# Altium PCB CPU.PcbDoc (part 2 of 2)
Units mm, origin at the board's own origin, x right, y up, seen from the top; angles counter-clockwise.
Board outline 46.9 x 22.5 mm, 2 copper layers (Top Layer, Bottom Layer), stack 0.904 mm thick; 53 components, 92 nets, 333 pads, 142 vias.
Unrouted connection lines stored in the file: 2.
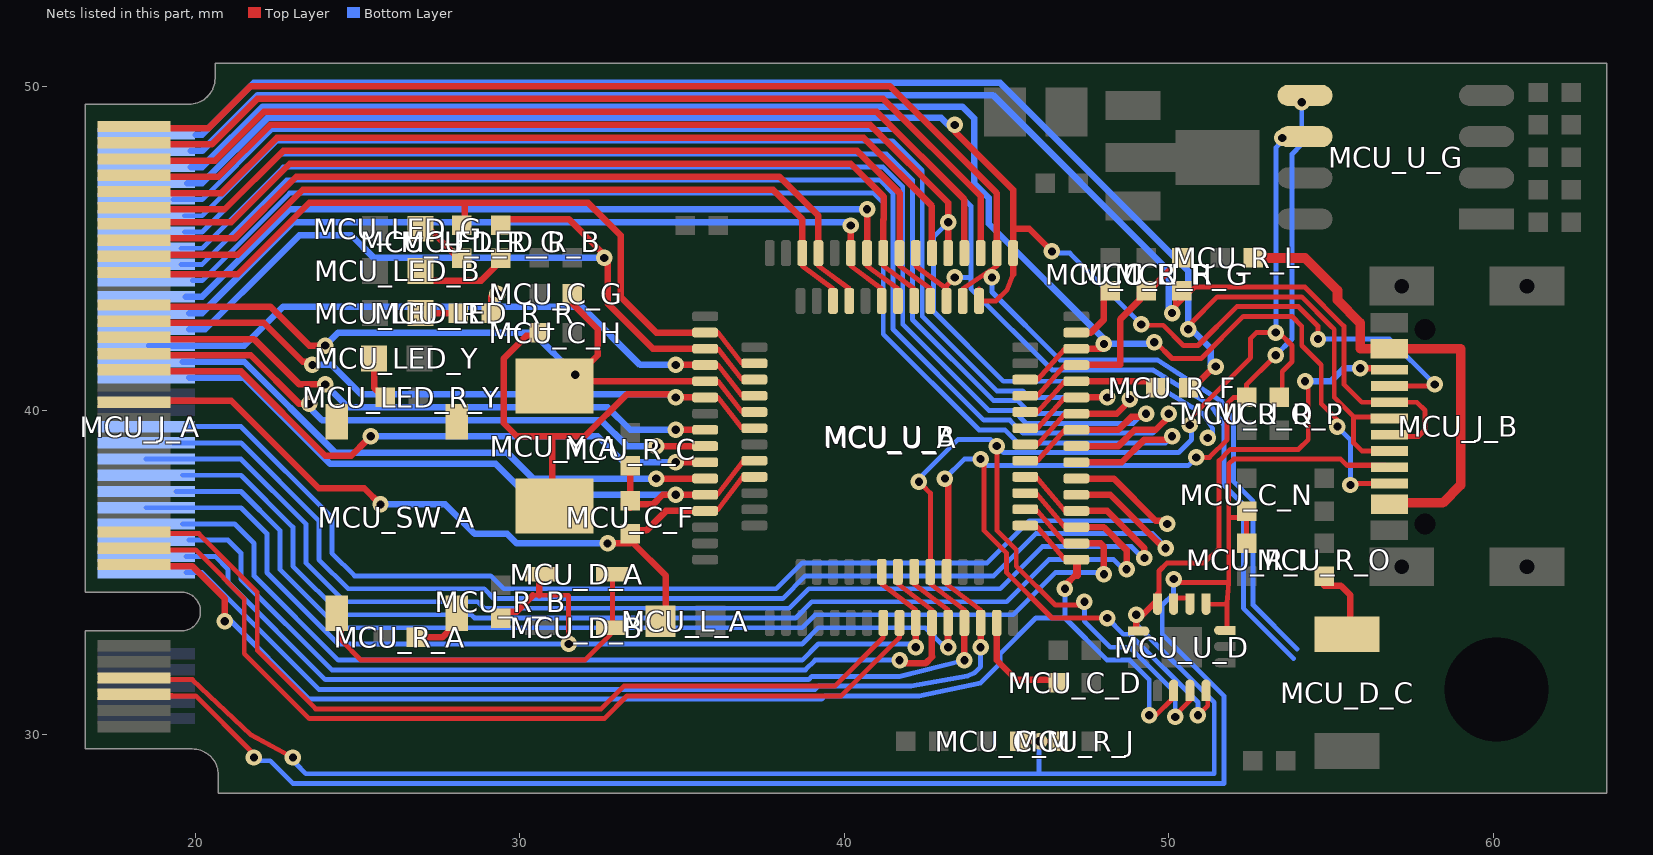
[diagram p2: the nets of this part, all layers, seen from the top]

## Via types
v1: diameter 0.508, hole 0.254, Top Layer to Bottom Layer, tented both sides, 142 vias

## Nets (pads, with @x,y where several pads share a name; then routed paths per layer and width w, separated by ;. In a path a pad name is that pad's centre, name@x,y a point inside that pad or via, vN(x,y) a via of type N, cw(c..) or ccw(c..) an arc to the next point about the centre after c; other vN are vias at no path point) (continued)
MCU_PA8: MCU_J_A.60 MCU_U_A.41 MCU_U_B.29 | length 40.6
  Top Layer w0.15: MCU_U_B.29@45.95,38.45 MCU_U_A.41@46.8,39.4
  Top Layer w0.2: MCU_U_A.41@47.05,39.4 MCU_U_A.41@47.15,39.4 48.45,39.4 48.85,39.8 49.2,39.8 v1(49.3,39.9) v1@49.4,39.9
  Bottom Layer w0.15: MCU_J_A.60@19.55,45 20.2,45 22.7,47.5 41.2,47.5 41.8,46.9 41.8,42.65 44.45,40 45.2,40 45.6,39.6 48.9,39.6 49.25,39.95 v1(49.3,39.9) v1@49.4,39.9
MCU_PA9: MCU_J_A.62 MCU_U_A.42 MCU_U_B.30 | length 39.6
  Top Layer w0.15: MCU_U_B.30@45.95,38.95 MCU_U_A.42@46.8,39.9
  Top Layer w0.2: MCU_U_A.42@46.95,39.9 MCU_U_A.42@47.15,39.9 48.4,39.9 48.8,40.3 v1@48.9,40.3
  Bottom Layer w0.15: MCU_J_A.62@19.65,45.5 20.2,45.5 22.6,47.9 41.3,47.9 42.1,47.1 42.1,42.8 44.6,40.3 45.35,40.3 45.75,39.9 48.4,39.9 48.8,40.3 v1(48.8,40.35)
MCU_PA10: MCU_J_A.64 MCU_U_A.43 MCU_U_B.31 | length 37.8
  Top Layer w0.15: MCU_U_B.31@45.95,39.45 MCU_U_A.43@46.8,40.4
  Top Layer w0.2: MCU_U_A.43@46.9,40.4 MCU_U_A.43@47.15,40.4 v1(48.1,40.4)
  Bottom Layer w0.15: MCU_J_A.64@19.65,46 20.2,46 22.51,48.31 41.49,48.31 42.4,47.4 42.4,42.9 44.7,40.6 45.5,40.6 45.7,40.4 v1(48.1,40.4)
MCU_PA15: MCU_J_A.75 MCU_U_A.50 MCU_U_B.38 | length 48.2
  Top Layer w0.15: MCU_U_B.38@43.65,43.375 43.65,43.75 44.435,44.273 44.469,44.296 MCU_U_A.50@44.7,44.45
  Top Layer w0.2: MCU_J_A.75@19.1,48.7 20.4,48.7 21.7,50 41.4,50 44.7,46.7 MCU_U_A.50@44.7,45
  Bottom Layer w0.15: v1(44.55,44.1) 44.55,43.65 46.65,41.55 49.65,41.55 51.6,40.3 52,39.682 52,37.8 52.6,37.2 52.6,34 53.95,32.65
MCU_PB0: MCU_J_A.26 MCU_U_A.26 MCU_U_B.18 | length 27.8
  Top Layer w0.15: MCU_U_B.18@41.15,35.025 41.15,34.65 MCU_U_A.26@42.2,33.85
  Top Layer w0.2: v1(42.2,32.7) MCU_U_A.26@42.2,33.6
  Bottom Layer w0.15: MCU_J_A.26@19.6,36.5 21.2,36.5 21.8,35.9 21.8,34.9 24.4,32.3 38.7,32.3 39.2,32.8 42.1,32.8 v1(42.2,32.7)
MCU_PB1: MCU_J_A.24 MCU_U_A.27 MCU_U_B.19 | length 27.6
  Top Layer w0.15: MCU_U_B.19@41.65,34.65 MCU_U_A.27@42.7,33.85
  Top Layer w0.2: v1@41.8,32.2 42.5,32.2 42.706,32.41 42.7,32.416 MCU_U_A.27@42.7,33.5
  Bottom Layer w0.15: MCU_J_A.24@19.8,36 21,36 21.4,35.6 21.4,34.8 24.2,32 38.8,32 39.1,32.3 v1(41.7,32.3)
MCU_PB2: MCU_D_A.2 MCU_J_A.28 MCU_R_B.2 MCU_U_A.28 MCU_U_B.20 | length 34.5
  Top Layer w0.15: 30.4,34.3 30.6,34.3 31.5,34.3 v1(31.5,32.8) ; MCU_U_B.20@42.15,34.65 MCU_U_A.28@43.2,33.85
  Top Layer w0.2: MCU_R_B.2@29.4,33.8 29.9,33.8 30.4,34.3 ; 30.6,34.3 MCU_D_A.2@30.6,34.9 ; v1(43.2,32.7) v1@43.2,32.8 ; 43.2,33 v1@43.2,32.8 ; MCU_U_A.28@43.2,33.4 43.194,33.394 43.194,32.806 v1@43.2,32.8
  Bottom Layer w0.15: MCU_J_A.28@18.475,37 21.4,37 22.2,36.2 22.2,35 ; 22.4,34.8 22.2,35 ; v1(43.2,32.7) 43.1,32.7 42.5,33.3 39.2,33.3 38.7,32.8 v1(31.5,32.8) 24.4,32.8 22.2,35
MCU_PB3: MCU_J_A.66 MCU_U_A.55 MCU_U_B.39 | length 49.1
  Top Layer w0.15: MCU_U_A.55@42.2,44.45 MCU_U_B.39@43.15,43.75 ; MCU_U_B.39@43.15,43.375 MCU_U_B.39@43.15,43.75 ; v1(43.4,44.1) 43.15,43.85 MCU_U_B.39@43.15,43.75
  Bottom Layer w0.15: MCU_J_A.66@19.3,46.5 20.2,46.5 22.362,48.662 41.538,48.662 43.9,46.3 43.9,44.05 ; v1(43.4,44.1) 43.85,44.1 43.9,44.05 ; 53.85,32.35 52.3,33.9 52.3,37.1 51.7,37.7 51.7,39.532 51.3,40.15 49.5,41.25 46.4,41.25 43.9,43.75 43.9,44.05
MCU_PB4: MCU_J_A.65 MCU_U_A.56 MCU_U_B.40 | length 27.1
  Top Layer w0.15: MCU_U_A.56@41.7,44.45 MCU_U_B.40@42.65,43.75
  Top Layer w0.2: MCU_J_A.65@19,46.2 20.9,46.2 22.7,48 40.4,48 41.7,46.7 MCU_U_A.56@41.7,44.75
MCU_PB5: MCU_J_A.63 MCU_U_A.57 MCU_U_B.41 | length 26.4
  Top Layer w0.15: MCU_U_A.57@41.2,44.45 MCU_U_B.41@42.15,43.75
  Top Layer w0.2: MCU_J_A.63@19,45.8 21.1,45.8 22.9,47.6 40.2,47.6 41.206,46.594 41.206,45.89 41.2,45.884 MCU_U_A.57@41.2,44.75
MCU_PB6: MCU_J_A.54 MCU_U_A.58 MCU_U_B.42 | length 24.8
  Top Layer w0.15: MCU_U_A.58@40.7,44.45 MCU_U_B.42@41.65,43.75 ; MCU_U_A.58@40.7,44.75 MCU_U_A.58@40.7,44.85
  Top Layer w0.2: MCU_U_A.58@40.7,44.75 v1(40.7,46.2)
  Bottom Layer w0.2: MCU_J_A.54@19.7,43.5 20.2,43.5 22.9,46.2 v1(40.7,46.2)
MCU_PB7: MCU_J_A.52 MCU_U_A.59 MCU_U_B.43 | length 24.3
  Top Layer w0.15: MCU_U_A.59@40.2,44.45 MCU_U_B.43@41.15,43.75 ; MCU_U_B.43@41.1,43.7 MCU_U_B.43@41.15,43.375
  Top Layer w0.2: MCU_U_A.59@40.2,44.65 MCU_U_A.59@40.2,44.85 v1(40.2,45.7)
  Bottom Layer w0.2: MCU_J_A.52@19.8,43 20.2,43 23,45.8 40.1,45.8 v1(40.2,45.7) v1@40.2,45.8
MCU_PB8: MCU_J_A.61 MCU_U_A.61 MCU_U_B.45 | length 24.1
  Top Layer w0.15: MCU_U_A.61@39.2,44.45 40.15,43.75 MCU_U_B.45@40.15,43.375
  Top Layer w0.2: MCU_J_A.61@18.9,45.3 21.2,45.3 23.1,47.2 38,47.2 39.2,46 MCU_U_A.61@39.2,45
MCU_PB9: MCU_J_A.59 MCU_U_A.62 MCU_U_B.46 | length 23.9
  Top Layer w0.15: MCU_U_A.62@38.7,44.45 39.65,43.75 MCU_U_B.46@39.65,43.375
  Top Layer w0.2: MCU_J_A.59@18.9,44.8 21.3,44.8 23.3,46.8 37.8,46.8 38.7,45.9 MCU_U_A.62@38.7,44.85 MCU_U_A.62@38.7,44.55
MCU_PB10: MCU_J_A.22 MCU_R_P.1 MCU_U_A.29 MCU_U_B.21 MCU_U_D.6 MCU_U_G.6 | length 66.5
  Top Layer w0.15: v1@42.4,37.7 42.65,37.45 MCU_U_B.21@42.65,35.3 ; MCU_U_B.21@42.6,35.25 MCU_U_B.21@42.65,35.3 ; MCU_U_B.21@42.65,34.65 MCU_U_A.29@43.7,33.85 ; MCU_U_B.21@42.65,35.025 MCU_U_B.21@42.65,35.3 ; v1@44.7,39 v1(44.7,38.9) 44.7,36.3 44.9,36.1 45.3,35.7 45.3,35.2 46.5,34 47.3,34 v1@47.5,34.2 ; v1@50.2,30.6 50.65,31.05 MCU_U_D.6@50.65,31.185 ; v1(50.65,39.55) 50.75,39.55 50.6,39.7 52.525,41.625 52.525,42.225 52.7,42.4 v1@53.2,42.4 ; MCU_R_P.1@53.4,40.408 53.5,40.508 53.5,41.2 53.8,41.5 53.8,42 v1@53.4,42.4
  Top Layer w0.2: v1(43.7,32.3) MCU_U_A.29@43.7,33.45 MCU_U_A.29@43.75,33.5
  Bottom Layer w0.15: MCU_J_A.22@19.7,35.5 20.6,35.5 21,35.1 21,34.7 24,31.7 38.9,31.7 39,31.8 41.7,31.8 v1(43.7,32.3) ; v1@42.4,37.9 42.4,38 43.5,39.1 44.5,39.1 v1(44.7,38.9) ; v1@44.7,39 v1(44.7,38.9) ; v1(47.4,34.1) 47.4,33.5 48.2,32.7 48.8,32.7 50.2,31.3 v1@50.2,30.6 ; v1(50.65,39.55) 50.7,39.5 50.7,39.1 50.3,38.7 44.9,38.7 v1(44.7,38.9) ; v1(53.3,42.4) 53.3,47.7 53.3,47.9 53.3,48.1 53.55,48.35 v1(53.5,48.4)
  other v1: 50.2,30.55 42.3,37.8
MCU_PB11: MCU_J_A.20 MCU_R_Q.1 MCU_U_A.30 MCU_U_B.22 MCU_U_D.7 MCU_U_G.5 | length 65
  Top Layer w0.15: MCU_U_B.22@43.15,34.65 MCU_U_A.30@44.2,33.85 ; v1@44.3,38.6 44.3,36.3 45,35.6 45,35 46.4,33.6 v1(48.1,33.6) ; v1(50.85,38.55) 51.25,38.55 51.8,39.1 51.8,40.2 52,40.4 MCU_R_Q.1@52.3,40.4 ; v1(50.9,30.6) 51.2,30.9 MCU_U_D.7@51.2,31.3 ; MCU_R_Q.1@52.4,40.408 52.4,40.8 v1@53.2,41.6
  Top Layer w0.2: MCU_U_B.22@43.15,35.025 43.2,35.075 v1@43.2,38 ; v1(44.2,32.7) MCU_U_A.30@44.2,33.2
  Bottom Layer w0.15: MCU_J_A.20@19.7,35 20.2,35 23.8,31.4 39.1,31.4 39.2,31.5 42.054,31.5 43.794,31.814 44,31.9 44.2,32.1 v1(44.2,32.7) ; v1(43.1,37.9) 43.7,38.5 v1(44.2,38.5) 44.4,38.3 50.6,38.3 50.8,38.5 50.85,38.45 v1(50.85,38.55) ; v1(48.1,33.6) 48.6,33.1 48.8,33.1 50.9,31 v1(50.9,30.6) ; v1(53.3,41.7) 53.8,42.2 53.8,47.1 53.8,47.7 53.8,47.9 54.1,48.2 v1(54.1,49.5)
MCU_PB12: MCU_J_A.21 MCU_U_A.33 MCU_U_B.25 MCU_U_D.5 | length 40.3
  Top Layer w0.15: MCU_U_B.25@45.95,36.4 MCU_U_A.33@46.8,35.4 ; v1@49.6,30.6 50.1,31.1 50.1,31.135 MCU_U_D.5@50.15,31.185
  Top Layer w0.2: MCU_J_A.21@18.8,35.2 19.9,35.2 20.9,34.2 v1(20.9,33.5) ; v1(46.8,34.5) 46.8,34.6 47.15,34.95 ; 47.15,34.9 47.15,34.95 ; MCU_U_A.33@47.15,35.4 47.15,34.95 ; 47.2,34.9 47.2,35 ; MCU_U_A.33@47.2,35.4 47.2,35 ; 47.15,34.95 47.2,35
  Bottom Layer w0.15: v1@21,33.6 23.5,31.1 39.3,31.1 39.4,31.2 42.3,31.2 44.2,31.6 44.8,32.2 44.8,32.5 45.9,33.6 46.8,33.6 ; v1(46.8,34.5) 46.8,33.6 ; v1(49.4,30.6) 49.4,31.7 48.8,32.3 48.1,32.3 46.8,33.6
MCU_PB13: MCU_J_A.30 MCU_U_A.34 MCU_U_B.26 | length 35.4
  Top Layer w0.15: MCU_U_B.26@45.95,36.9 MCU_U_A.34@46.8,35.9
  Top Layer w0.2: MCU_U_A.34@46.85,35.9 MCU_U_A.34@47.15,35.9 47.9,35.9 48,35.8 v1(48,34.95)
  Bottom Layer w0.15: MCU_J_A.30@19.4,37.5 21.4,37.5 22.6,36.3 22.6,35.1 24.4,33.3 38.7,33.3 39.1,33.7 45.2,33.7 46.5,35 48.15,35 48.1,34.95 v1(48,34.95)
MCU_PB14: MCU_J_A.32 MCU_U_A.35 MCU_U_B.27 | length 36.8
  Top Layer w0.15: MCU_U_B.27@45.904,37.454 MCU_U_A.35@46.8,36.4
  Top Layer w0.2: MCU_U_A.35@47.05,36.4 MCU_U_A.35@47.15,36.4 48,36.4 48.7,35.7 v1(48.7,35.1)
  Bottom Layer w0.15: MCU_J_A.32@19.6,38 21.4,38 23,36.4 23,35.2 24.5,33.7 28.5,33.7 28.6,33.6 38.5,33.6 39,34.1 45,34.1 46.3,35.4 48.3,35.4 v1@48.725,34.975 ; v1(48.7,35.1) 48.7,35 v1@48.75,34.95 ; v1@48.725,34.975 v1@48.75,34.95 ; v1@48.725,34.975 48.75,35 v1@48.75,34.95
MCU_PB15: MCU_J_A.34 MCU_U_A.36 MCU_U_B.28 | length 38.9
  Top Layer w0.15: MCU_U_B.28@45.904,37.954 MCU_U_A.36@46.8,36.9
  Top Layer w0.2: MCU_U_A.36@46.95,36.9 MCU_U_A.36@47.15,36.9 48.1,36.9 49.25,35.75 v1(49.25,35.45) v1@49.25,35.35
  Bottom Layer w0.15: MCU_J_A.34@18.475,38.5 21.4,38.5 23.4,36.5 23.4,35.3 24.6,34.1 28.7,34.1 28.9,33.9 38.3,33.9 38.9,34.5 44.8,34.5 46.1,35.8 48.85,35.8 49.2,35.45 v1(49.25,35.45)
MCU_PC0: MCU_J_A.49 MCU_U_A.8 | length 18.4
  Top Layer w0.2: MCU_J_A.49@18.9,42.2 21.8,42.2 23.2,40.8 v1(24,40.8) v1@24.1,40.9 ; v1@34.7,39.4 v1(34.8,39.4) MCU_U_A.8@35.708,39.4 MCU_U_A.8@35.95,39.4
  Bottom Layer w0.2: v1(24,40.8) 24.7,40.1 32.7,40.1 33.4,39.4 v1@34.7,39.4
MCU_PC1: MCU_J_A.47 MCU_U_A.9 | length 17.8
  Top Layer w0.2: MCU_J_A.47@19.1,41.7 21.7,41.7 23.2,40.2 v1(23.5,40.2) v1@23.5,40.1 ; v1(34.2,38.9) MCU_U_A.9@35.708,38.9 MCU_U_A.9@35.85,38.9
  Bottom Layer w0.2: v1@23.6,40.2 23.6,40 23.9,39.7 32.5,39.7 33.3,38.9 v1@34,38.9
MCU_PC2: MCU_J_A.45 MCU_U_A.10 | length 18.3
  Top Layer w0.2: MCU_J_A.45@19.2,41.2 21.4,41.2 24,38.6 24.8,38.6 v1@25.3,39.1 ; v1@34.7,38.4 v1(34.8,38.4) MCU_U_A.10@35.708,38.4 MCU_U_A.10@35.95,38.4
  Bottom Layer w0.2: v1(25.4,39.2) 32.4,39.2 33.2,38.4 v1@34.7,38.4
MCU_PC3: MCU_J_A.46 MCU_U_A.11 | length 17.8
  Top Layer w0.2: v1@34.1,37.9 v1(34.2,37.9) MCU_U_A.11@35.708,37.9 MCU_U_A.11@35.95,37.9
  Bottom Layer w0.2: MCU_J_A.46@19.6,41.5 21.5,41.5 24.3,38.7 29.6,38.7 30.4,37.9 v1@34.1,37.9
MCU_PC4: MCU_J_A.25 MCU_U_A.24 | length 27.1
  Top Layer w0.15: MCU_J_A.25@18.9,36.2 20.1,36.2 21.9,34.4 21.9,32.6 21.902,32.6 23.702,30.8 32.5,30.8 33.2,31.5 39.7,31.5 41.2,33 MCU_U_A.24@41.2,33.45 MCU_U_A.24@41.2,33.55
MCU_PC5: MCU_J_A.23 MCU_U_A.25 | length 27.6
  Top Layer w0.15: MCU_J_A.23@18.8,35.7 20,35.7 20.2,35.5 21.5,34.2 21.5,32.5 21.503,32.5 23.503,30.5 32.6,30.5 33.3,31.2 39.9,31.2 41.694,32.994 41.694,33.544 MCU_U_A.25@41.7,33.55
MCU_PC6: MCU_J_A.36 MCU_U_A.37 | length 37.7
  Top Layer w0.2: MCU_U_A.37@47.25,37.4 47.9,37.4 48.1,37.4 48.2,37.4 49.4,36.2 v1@49.875,35.725
  Bottom Layer w0.15: MCU_J_A.36@19.3,39 21.4,39 23.8,36.6 23.8,35.4 24.7,34.5 28.9,34.5 29.2,34.2 38.1,34.2 38.8,34.9 44.6,34.9 45.9,36.2 49.5,36.2 49.95,35.75 v1(49.9,35.75)
MCU_PC7: MCU_J_A.38 MCU_U_A.38 | length 37.8
  Top Layer w0.2: MCU_U_A.38@46.85,37.9 MCU_U_A.38@47.15,37.9 48.3,37.9 49.6,36.6 49.9,36.6 49.95,36.65 v1(49.95,36.5)
  Bottom Layer w0.15: MCU_J_A.38@19.7,39.5 21.4,39.5 24.2,36.7 24.2,35.6 24.9,34.9 29.1,34.9 29.5,34.5 37.9,34.5 38.7,35.3 44.4,35.3 45.7,36.6 49.9,36.6 49.95,36.65 v1(49.95,36.5)
MCU_PC8: MCU_J_A.56 MCU_U_A.39 | length 40.3
  Top Layer w0.2: MCU_U_A.39@47.05,38.4 MCU_U_A.39@47.15,38.4 48.55,38.4 49.25,39.1 50,39.1 v1(50.1,39.2)
  Bottom Layer w0.15: MCU_J_A.56@19.9,44 20.2,44 22.9,46.7 40.9,46.7 41.2,46.4 41.2,42.35 44.15,39.4 44.95,39.4 45.35,39 49.9,39 v1(50.1,39.2)
MCU_PC9: MCU_J_A.58 MCU_U_A.40 | length 41
  Top Layer w0.2: MCU_U_A.40@47.05,38.9 MCU_U_A.40@47.15,38.9 48.45,38.9 48.95,39.4 49.6,39.4 50.05,39.85 v1(50,39.9)
  Bottom Layer w0.15: MCU_J_A.58@19.55,44.5 20.2,44.5 22.8,47.1 41.1,47.1 41.5,46.7 41.5,42.5 44.3,39.7 45.1,39.7 45.5,39.3 49.5,39.3 50.05,39.85 v1(50,39.9)
MCU_PC10: MCU_J_A.73 MCU_U_A.51 | length 28.8
  Top Layer w0.2: MCU_J_A.73@19.1,48.2 20.5,48.2 21.9,49.6 41.2,49.6 44.2,46.6 44.2,45.7 MCU_U_A.51@44.2,44.85 MCU_U_A.51@44.2,44.75
MCU_PC11: MCU_J_A.71 MCU_U_A.52 | length 28.1
  Top Layer w0.2: MCU_J_A.71@19.1,47.7 20.6,47.7 22.1,49.2 41,49.2 43.7,46.5 MCU_U_A.52@43.7,44.85 MCU_U_A.52@43.7,44.75
MCU_PC12: MCU_J_A.69 MCU_U_A.53 | length 40.6
  Top Layer w0.2: MCU_J_A.69@19.1,47.2 20.7,47.2 22.3,48.8 40.8,48.8 43.2,46.4 43.2,45.95 MCU_U_A.53@43.2,44.85 MCU_U_A.53@43.2,44.75
  Bottom Layer w0.15: v1(43.2,45.8) 42.75,45.35 42.75,43.05 44.9,40.9 49.4,40.9 51.05,39.9 51.35,39.45 v1@51.35,39.2
  other v1: 51.2,39.15
MCU_PC13: MCU_J_A.57 MCU_LED_R_G.1 MCU_U_A.2 MCU_U_B.2 | length 23.7
  Top Layer w0.15: MCU_U_A.2@36.1,42.4 MCU_U_B.2@36.85,41.45
  Top Layer w0.2: MCU_J_A.57@18.7,44.2 21.3,44.2 23.5,46.4 28.3,46.4 ; MCU_LED_R_G.1@28.4,45.5 28.3,45.6 28.3,46.4 ; 35.1,42.4 MCU_U_A.2@35.708,42.4 35.85,42.4 34.2,42.4 33.1,43.5 33.1,45.4 32.1,46.4 28.3,46.4
MCU_PC14: MCU_J_A.50 MCU_LED_R_B.1 MCU_U_A.3 MCU_U_B.3 | length 24.7
  Top Layer w0.15: MCU_U_A.3@35.708,41.9 36.1,41.9 MCU_U_B.3@36.85,40.95
  Top Layer w0.2: MCU_LED_R_B.1@29.4,45.708 29.592,45.9 31.5,45.9 v1@32.6,44.8 ; v1(32.6,44.7) 32.7,44.6 32.7,43.3 34.1,41.9 MCU_U_A.3@35.708,41.9
  Bottom Layer w0.2: MCU_J_A.50@19.8,42.5 20.3,42.5 22.5,44.7 23.2,45.4 24.8,45.4 25.5,44.7 v1(32.6,44.7)
MCU_PC15: MCU_J_A.48 MCU_LED_R_R.1 MCU_U_A.4 MCU_U_B.4 | length 20.9
  Top Layer w0.15: MCU_U_A.4@36.1,41.4 MCU_U_B.4@36.85,40.45
  Top Layer w0.2: MCU_LED_R_R.1@29.108,43 29.108,43.508 v1@29.2,43.6 ; v1@34.7,41.4 v1(34.8,41.4) MCU_U_A.4@35.708,41.4 MCU_U_A.4@35.95,41.4
  Bottom Layer w0.2: MCU_J_A.48@18.575,42 21.5,42 22.7,43.2 29.3,43.2 ; v1(29.3,43.6) 29.3,43.2 ; v1@34.7,41.4 33.7,41.4 31.9,43.2 29.3,43.2
MCU_PD2: MCU_J_A.67 MCU_U_A.54 | length 26.8
  Top Layer w0.2: MCU_J_A.67@19,46.7 20.8,46.7 22.5,48.4 40.6,48.4 42.7,46.3 MCU_U_A.54@42.7,44.85 MCU_U_A.54@42.7,44.75
MCU_USB_CC1: MCU_C_N.1 MCU_J_A.5 MCU_J_B.A5 MCU_R_I.1 MCU_U_D.10 MCU_U_D.11 | length 58.3
  Top Layer w0.15: MCU_J_A.5@18.1,31.25 19.9,31.2 ; MCU_J_A.5@19,31.2 19.9,31.2 ; v1(21.8,29.3) 21.7,29.5 20,31.2 19.9,31.2 ; v1@50.3,34.7 51.85,34.7 ; MCU_U_D.11@51.15,34.025 51.775,34.025 ; MCU_U_D.10@51.8,33.3 51.8,34 51.775,34.025 ; MCU_R_I.1@52.4,35.708 52.4,35.808 MCU_C_N.1@52.4,36.692 ; MCU_C_N.1@52.4,36.7 51.85,36.7 ; MCU_J_B.A5@57.1,38.3 MCU_J_B.A5@56.7,38.3 ; 51.775,34.025 51.8,34.05 51.85,34.7 ; 51.85,34.7 51.85,36.7 ; 51.85,36.7 51.85,38.35 52,38.5 55.3,38.5 55.475,38.325 ; 55.475,38.325 55.5,38.3 MCU_J_B.A5@56.7,38.3 ; 55.475,38.325 56.675,38.325 MCU_J_B.A5@56.7,38.3
  Bottom Layer w0.15: v1@21.8,29.2 22.3,29.2 23,28.5 51.7,28.5 51.7,31.2 49.8,33.1 49.8,34 50.15,34.35 v1(50.15,34.8)
MCU_USB_CC2: MCU_C_M.1 MCU_J_A.7 MCU_J_B.B5 MCU_R_J.1 MCU_U_D.1 MCU_U_D.14 | length 56.2
  Top Layer w0.15: MCU_J_A.7@18.9,31.7 19.9,31.7 21.7,30 v1(23,29.3) ; MCU_C_M.1@45.6,29.8 v1(46,29.8) MCU_R_J.1@46.592,29.8 ; MCU_U_D.14@49.65,34.215 49.65,34.35 49.7,34.4 49.7,35.05 49.95,35.3 51.1,35.3 51.55,35.75 51.55,38.45 51.9,38.8 54,38.8 54.3,39.1 v1@54.3,40.9
  Top Layer w0.2: MCU_U_D.1@48.885,33.196 49,33.311 v1(49,33.7) 49.2,33.7 MCU_U_D.14@49.6,34.1 ; v1(55.9,41.3) MCU_J_B.B5@57.2,41.3
  Bottom Layer w0.15: v1@23.1,29.1 23.4,28.8 46,28.8 ; v1@46,29.7 46,28.8 ; v1(49,33.7) 49,33.4 51.4,31 51.4,28.8 46,28.8
  Bottom Layer w0.2: v1(54.2,40.9) 55,40.9 55.4,41.3 v1(55.9,41.3)
MCU_VDDA: MCU_C_F.2 MCU_J_A.41 MCU_L_A.1 MCU_U_A.13 MCU_U_B.9 | length 23.2
  Top Layer w0.15: MCU_U_A.13@36.1,36.95 MCU_U_B.9@36.9,38
  Top Layer w0.2: MCU_J_A.41@19,40.3 21.1,40.3 23.8,37.6 25.2,37.6 v1(25.7,37.1) ; v1(32.7,35.9) MCU_C_F.2@33.4,35.9 ; MCU_C_F.2@33.4,36 33.4,35.992 33.492,35.9 33.492,35.908 34.5,34.9 34.5,33.8 MCU_L_A.1@34.2,33.8 ; MCU_C_F.2@33.5,36.2 33.6,36.3 33.9,36.3 34.5,36.9 MCU_U_A.13@35.708,36.9 MCU_U_A.13@35.85,36.9
  Bottom Layer w0.2: v1(25.7,37.1) 27.7,37.1 28.6,36.2 29.6,36.2 29.9,35.9 v1(32.7,35.9)
MCU_VSSA: MCU_C_F.1 MCU_J_A.44 MCU_R_C.2 MCU_U_A.12 MCU_U_B.8 | length 21.9
  Top Layer w0.15: MCU_U_A.12@36.094,37.405 36.89,38.45 MCU_U_B.8@37.225,38.45
  Top Layer w0.2: MCU_C_F.1@33.2,37.1 MCU_C_F.1@33.4,37.1 ; MCU_C_F.1@33.4,37 MCU_C_F.1@33.4,37.1 ; MCU_R_C.2@33.4,38.092 MCU_C_F.1@33.4,37.208 MCU_C_F.1@33.4,37.1 ; v1@34.6,37.4 v1(34.8,37.4) ; MCU_U_A.12@35.85,37.4 MCU_U_A.12@35.708,37.4 v1(34.8,37.4) ; MCU_C_F.1@33.4,37.1 34.1,37.1 34.4,37.4 v1(34.8,37.4)
  Bottom Layer w0.2: MCU_J_A.44@19.8,41 21.5,41 24.15,38.35 29.25,38.35 30.2,37.4 34.5,37.4
MCU_XIN: MCU_C_G.2 MCU_J_A.53 MCU_U_A.5 MCU_U_B.5 MCU_Y_A.1 | length 22.6
  Top Layer w0.15: MCU_U_A.5@36.1,40.9 MCU_U_B.5@36.85,39.95
  Top Layer w0.2: MCU_J_A.53@19.1,43.2 22.3,43.2 23.5,42 v1(24,42) ; MCU_Y_A.1@31.1,41.3 MCU_Y_A.1@31.3,41.5 ; MCU_Y_A.1@31.5,41.4 MCU_Y_A.1@31.508,41.408 ; MCU_Y_A.1@31.6,40.8 32.1,41.3 32.1,40.9 MCU_U_A.5@35.708,40.9 MCU_U_A.5@35.8,40.9 ; MCU_C_G.2@31.608,43.3 31.608,43.292 32.4,42.5 32.4,41.7 MCU_Y_A.1@32,41.3
  Bottom Layer w0.2: v1(24,42) 24.4,42.4 30.4,42.4 v1(31.7,41.1)
MCU_XOUT: MCU_C_H.2 MCU_J_A.51 MCU_U_A.6 MCU_U_B.6 MCU_Y_A.2 | length 29.7
  Top Layer w0.15: MCU_U_A.6@36.1,40.4 MCU_U_B.6@36.85,39.45
  Top Layer w0.2: MCU_J_A.51@19,42.7 22.1,42.7 23.3,41.5 v1@23.6,41.5 ; MCU_C_H.2@30.592,42.3 30.2,42.3 29.5,41.6 29.5,39.6 29.9,39.2 32,39.2 33.3,40.5 34.7,40.5 v1(34.8,40.4) MCU_U_A.6@35.708,40.4 MCU_U_A.6@35.85,40.4 ; MCU_Y_A.2@31,37.8 31,39.1 ; MCU_Y_A.2@31.7,37.1 MCU_Y_A.2@31.708,37.1
  Bottom Layer w0.2: v1(23.6,41.4) 24.2,41.4 25.1,40.5 v1@34.8,40.5
NetCHA_D_A_1: 
NetCHA_OPTO_1: 
NetCHA_Q_A_3: 
NetMCU_C_D_1: MCU_C_D.1 MCU_U_A.31 | length 3.4
  Top Layer w0.2: MCU_U_A.31@44.7,33.45 44.7,32.9 44.7,32.3 45.3,31.7 MCU_C_D.1@46.7,31.7
NetMCU_C_E_1: MCU_C_E.1 MCU_U_A.47 | length 2.2
  Top Layer w0.2: MCU_U_A.47@47.15,42.4 47.6,42.4 48,42.8 48,43.8 MCU_C_E.1@48.2,43.8
NetMCU_D_A_1: MCU_D_A.1 MCU_D_B.1 MCU_SW_A.2 | length 11.9
  Top Layer w0.15: MCU_SW_A.2@24.5,33.9 24.5,32.9 25.1,32.3 32,32.3 32.8,33.1 MCU_D_B.1@32.8,33.2 ; MCU_D_A.1@32.8,35.1 32.85,35.05 MCU_D_A.1@32.85,34.95 MCU_D_B.1@32.85,33.25
NetMCU_D_C_1: MCU_D_C.1 MCU_R_O.1 | length 1.9
  Top Layer w0.2: 54.8,34.592 55.308,34.592 55.6,34.3 MCU_D_C.1@55.6,33.3
NetMCU_LED_B_1: MCU_LED_B.1 MCU_LED_R_B.2 | length 3.1
  Top Layer w0.2: MCU_LED_B.1@26.93,44.3 27.23,44 28.8,44 MCU_LED_R_B.2@29.6,44.8
NetMCU_LED_G_1: MCU_LED_G.1 MCU_LED_R_G.2 | length 1.7
  Top Layer w0.2: MCU_LED_G.1@26.93,45.6 27.2,45.6 28,44.8 MCU_LED_R_G.2@28,44.5
NetMCU_LED_R_1: MCU_LED_R.1 MCU_LED_R_R.2 | length 1.3
  Top Layer w0.2: MCU_LED_R.1@26.8,43 MCU_LED_R_R.2@28.092,43
NetMCU_LED_R_Y_2: MCU_LED_R_Y.2 MCU_LED_Y.2 | length 1.3
  Top Layer w0.2: MCU_LED_Y.2@25.5,41.6 25.5,40.7 MCU_LED_R_Y.2@25.8,40.4
NetMCU_R_A_1: MCU_R_A.1 MCU_SW_A.1 | length 1.4
  Top Layer w0.2: MCU_R_A.1@26.808,33 27.6,33 MCU_SW_A.1@28,33.4 ; MCU_SW_A.1@28,39.3 MCU_SW_A.1@28.05,39.25
NetMCU_U_D_12: MCU_U_D.12 MCU_U_D.13 | length 0.6
  Top Layer w0.15: MCU_U_D.13@50.15,34.215 50.585,34.215 MCU_U_D.12@50.7,34.1
SWCLK: MCU_J_A.68 MCU_J_B.A8 MCU_U_A.49 MCU_U_B.37 | length 49.5
  Top Layer w0.15: MCU_U_B.37@44.15,43.75 MCU_U_B.37@44.15,43.375 ; MCU_U_B.37@44.2,43.7 MCU_U_B.37@44.15,43.375 ; 45.2,44.2 45,43.7 44.675,43.375 MCU_U_B.37@44.15,43.375 ; v1@49.35,42.6 49.375,42.625 49.825,42.625 50.45,42 50.9,42 52.1,43.2 54,43.2 54.6,42.6 v1(54.6,42.2) v1@54.7,42.2 ; MCU_J_B.A8@56.803,40.75 58.05,40.75 v1@58.1,40.7
  Top Layer w0.2: v1(43.4,48.8) 43.4,48.6 45.2,46.8 45.2,45.6 ; 45.2,44.2 MCU_U_A.49@45.2,44.85 45.2,45.6 ; v1@46.3,45 45.7,45.6 45.2,45.6
  Bottom Layer w0.15: v1@46.4,44.85 46.95,44.85 v1(49.15,42.65) ; v1(54.6,42.2) 56.8,42.2 v1(58.2,40.8) v1@58.25,40.75
  Bottom Layer w0.2: MCU_J_A.68@19.75,47 20.2,47 22.214,49.014 42.986,49.014 43.2,48.8 v1(43.4,48.8)
  other v1: 46.4,44.9
SWDIO: MCU_J_A.70 MCU_J_B.B8 MCU_U_A.46 MCU_U_B.34 | length 50.4
  Top Layer w0.15: MCU_U_B.34@45.65,41 45.95,40.95 46.8,41.9 MCU_U_A.46@47.15,41.9 ; v1@49.6,42.1 50.1,41.6 51,41.6 52.3,42.9 53.8,42.9 54.1,42.6 54.1,42 54.7,41.4 54.7,40.2 v1@55.3,39.6 ; v1(55.6,37.7) 55.65,37.75 MCU_J_B.B8@56.803,37.75
  Top Layer w0.2: MCU_U_A.46@47.15,41.9 v1@48,41.9
  Bottom Layer w0.15: v1(55.2,39.5) 55.6,39.1 v1(55.6,37.7)
  Bottom Layer w0.2: MCU_J_A.70@19.85,47.5 20.2,47.5 22.067,49.367 43.633,49.367 44,49 44,47 44.45,46.55 44.45,45.75 48,42.2 v1(48,42.05) 48,41.9 48.15,42.05 v1@49.65,42.05
  other v1: 49.55,42.1
USB_5_V: MCU_J_B.A4_B9 MCU_J_B.A9_B4 MCU_R_L.2 | length 14.3
  Top Layer w0.3: MCU_R_L.2@52.608,44.7 54.2,44.7 55.2,43.7 55.2,43.4 55.9,42.7 55.9,41.9 56.6,41.9 MCU_J_B.A9_B4@56.7,41.8 ; MCU_J_B.A4_B9@56.803,37.15 58.45,37.15 59,37.7 59,41.9 MCU_J_B.A9_B4@57.3,41.9
USB_DM: MCU_J_A.74 MCU_J_B.A7 MCU_J_B.B7 MCU_R_F.1 | length 50.3
  Top Layer w0.15: v1@50.7,42.4 50.7,42.7 51.5,43.5 54.1,43.5 55,42.6 55.1,42.5 55.1,40.4 55.7,39.8 ; MCU_J_B.B7@56.803,38.75 55.95,38.75 55.7,39 55.7,39.8 ; MCU_J_B.A7@57.1,39.8 55.7,39.8
  Top Layer w0.2: MCU_R_F.1@50.6,40.592 MCU_R_F.1@50.7,40.692 ; v1(51.45,41.35) 51.4,41.35 v1@51.379,41.329 ; MCU_R_F.1@50.7,40.692 50.592,40.692 50.6,40.7 MCU_R_F.1@50.608,40.7 MCU_R_F.1@50.708,40.7 ; MCU_R_F.1@50.7,40.692 MCU_R_F.1@50.708,40.7 ; MCU_R_F.1@50.708,40.7 50.729,40.679 51.325,41.275 v1@51.35,41.3 ; v1@51.35,41.3 51.35,41.358 v1@51.379,41.329 ; v1@51.35,41.3 v1@51.379,41.329
  Bottom Layer w0.2: 20,48.5 20.2,48.5 21.8,50.1 44.8,50.1 50.6,44.3 v1(50.6,42.5) 50.7,42.5 51.3,41.9 v1@51.3,41.4 ; v1@51.4,41.25 51.45,41.3 v1(51.45,41.35)
USB_DM_R: MCU_R_F.2 MCU_U_A.44 MCU_U_B.32 | length 3.8
  Top Layer w0.15: MCU_U_B.32@45.95,39.95 MCU_U_A.44@46.8,40.9
  Top Layer w0.2: MCU_U_A.44@47.15,40.9 MCU_R_F.2@49.7,40.9
USB_DP: MCU_J_A.72 MCU_J_B.A6 MCU_J_B.B6 MCU_R_G.1 | length 47.4
  Top Layer w0.15: v1@50,42.9 v1(50.1,43) ; v1@50.2,42.9 v1(50.1,43) ; v1@50.2,43.1 v1@50.2,43.2 ; MCU_R_G.1@50.2,43.6 v1@50.2,43.2 ; MCU_J_B.A6@57.3,39.2 57.7,39.2 57.9,39.4 57.9,40 57.65,40.25 MCU_J_B.B6@56.803,40.25 55.95,40.25 55.4,40.8 55.4,42.6 54.2,43.8 50.8,43.8 v1@50.2,43.2 ; v1(50.1,43) 50.1,43.1 v1@50.2,43.2
  Bottom Layer w0.2: MCU_J_A.72@19.85,48 20.2,48 21.919,49.719 44.581,49.719 50,44.3 v1@50,42.9
USB_DP_R: MCU_R_G.2 MCU_R_H.1 MCU_U_A.45 MCU_U_B.33 | length 6.8
  Top Layer w0.15: MCU_U_B.33@45.95,40.45 MCU_U_A.45@46.8,41.4
  Top Layer w0.2: MCU_U_A.45@47.15,41.4 48.5,41.4 48.5,42.8 49.1,43.4 49.1,43.6 MCU_R_H.1@49.2,43.7 ; MCU_R_H.1@49.2,43.692 49.29,43.722 49.499,43.792 MCU_R_G.2@50.4,44.7
pads on no net: MCU_J_A.1 MCU_J_A.3 MCU_J_B.M
copper on no net: | length 0.1
  Top Layer w0.15: 18.1,30.75 18.15,30.7

## Polygon pours and split planes (outlines as drawn)
MCU_GND on Top Layer "Top Layer-MCU_GND" (solid, remove dead copper, pour order 40): 42.3,28.5 63.2,28.5 63.2,50.4 42.3,50.4
CPU_5_V_SW on Top Layer "Top Layer-CPU_5_V_SW" (solid, pour order 36): 21.5,30.5 42.4,31.4 42.4,29.3 22.5,29.3 21.5,30.3
no net on Top Layer "Top Layer-No Net 2" (solid, pour order 38): 42.3,28.9
no net on Top Layer "Top Layer-No Net" (solid, pour order 22): 24,29.4
no net on Top Layer "Top Layer-No Net 1" (solid, pour order 32): 61.1,36.7
MCU_GND on Bottom Layer "Bottom Layer-GND" (solid, remove dead copper, pour order 24): 63.2,28.5 63.2,50.4 22.5,50.4 22.5,28.5
no net on Bottom Layer "Bottom Layer-No Net" (solid, pour order 48): 64.5,49.6

## Other copper
Top Layer:
  rectangle net MCU_GND: 47.1,49.2 48.7,49.6
  rectangle net MCU_3V3: 47.2,46 50.8,46.4
  rectangle net MCU_5V: 51.3,45.7 52.8,47.9
  rectangle net MCU_3V3: 36.6,44.2 37.2,45
  rectangle net MCU_3V3: 47.1,43.3 47.5,47
  rectangle net CPU_5_V_SW: 17.2,32.2 19.1,32.8
  region net CPU_5_V_SW: 21.196,30.803 19.9,32.1 19.6,32.1 19.6,32.8 20.7,32.8 23.8,29.7 23.124,29.7 22.397,30.001 cw(c23.814,33.421)
  region: 25.4,41.5
  region: 25.6,41.4
  region net MCU_3V3: 36,44.4 37.2,44.4 38.3,43.3 38.3,42.7 38.7,42.7 38.7,41.9 38.2,41.9 38,41.9 38,42.4 37.1,42.4 36,43.5
  region net MCU_3V3: 40.7,42 41.4,42.7 44.4,42.7 45.202,43.502 47.2,43.502 47.2,43.2 46.2,43.2 45.3,42.3 45,42.3 45,42
  region net MCU_GND: 39,36.6 39,38.8 40.4,38.8 43.2,41.6 44.7,41.6 44.7,39.3 42.1,39.3 39.4,36.6
  region net MCU_3V3: 38.6,39 40.3,39 43.2,41.9 38.6,41.9
  region net MCU_3V3: 38,36.2 38,42 38.7,42 38.7,36.8
  region: 17.3,30.2
  region: 28,36.9
  region: 31.7,36.7
  region: 43.3,35
  region: 49.6,34.9
  region: 49.8,35.1
Bottom Layer:
  rectangle net MCU_GND: 38.2,42.1 39.7,45.2
  rectangle net MCU_GND: 17.3,30.4 19.6,32.5
  rectangle net MCU_GND: 21,29.9 37.8,30.8
  region net MCU_PB10: 42.4,37.7
  region net MCU_GND: 41.216,38.6 42.6,38.6 42.6,40.1 37.5,45.2 36,45.2 36,41.3 36,36.4 38.928,36.4
  region net MCU_GND: 21.9,30
  region net MCU_GND: 20.7,29.9 20.3,30.3 20.1,30.3 20.1,32.7 21.3,32.7 24.1,29.9

## Silkscreen, mask and mechanical layers (free items; w line width, h text height)
Top Overlay:
  pour cut-out: 37.3,32.7 45.6,32.7 45.6,32.9 cw(c47.7,32.9) 47.7,35 47.9,35 47.9,43.25 47.85,43.25 cw(c47.85,45.5) 45.6,45.5 45.6,45.6 37.3,45.6 37.3,45.5 cw(c35.1,45.5) 35.1,43.3 35,43.3 35,35 35.2,35 cw(c35.2,32.9) 37.3,32.9
  text "B" at 21.2,29.4 h3.3
  text "JLCJLCJLCJLC" at 61,28.5 h0.8 r90
Bottom Overlay:
  text "B" at 53.9,36.2 h8
Board Outline (M30):
  the board outline again, w0.05